# EAGLE board breakout (EAGLE 9.4.2)
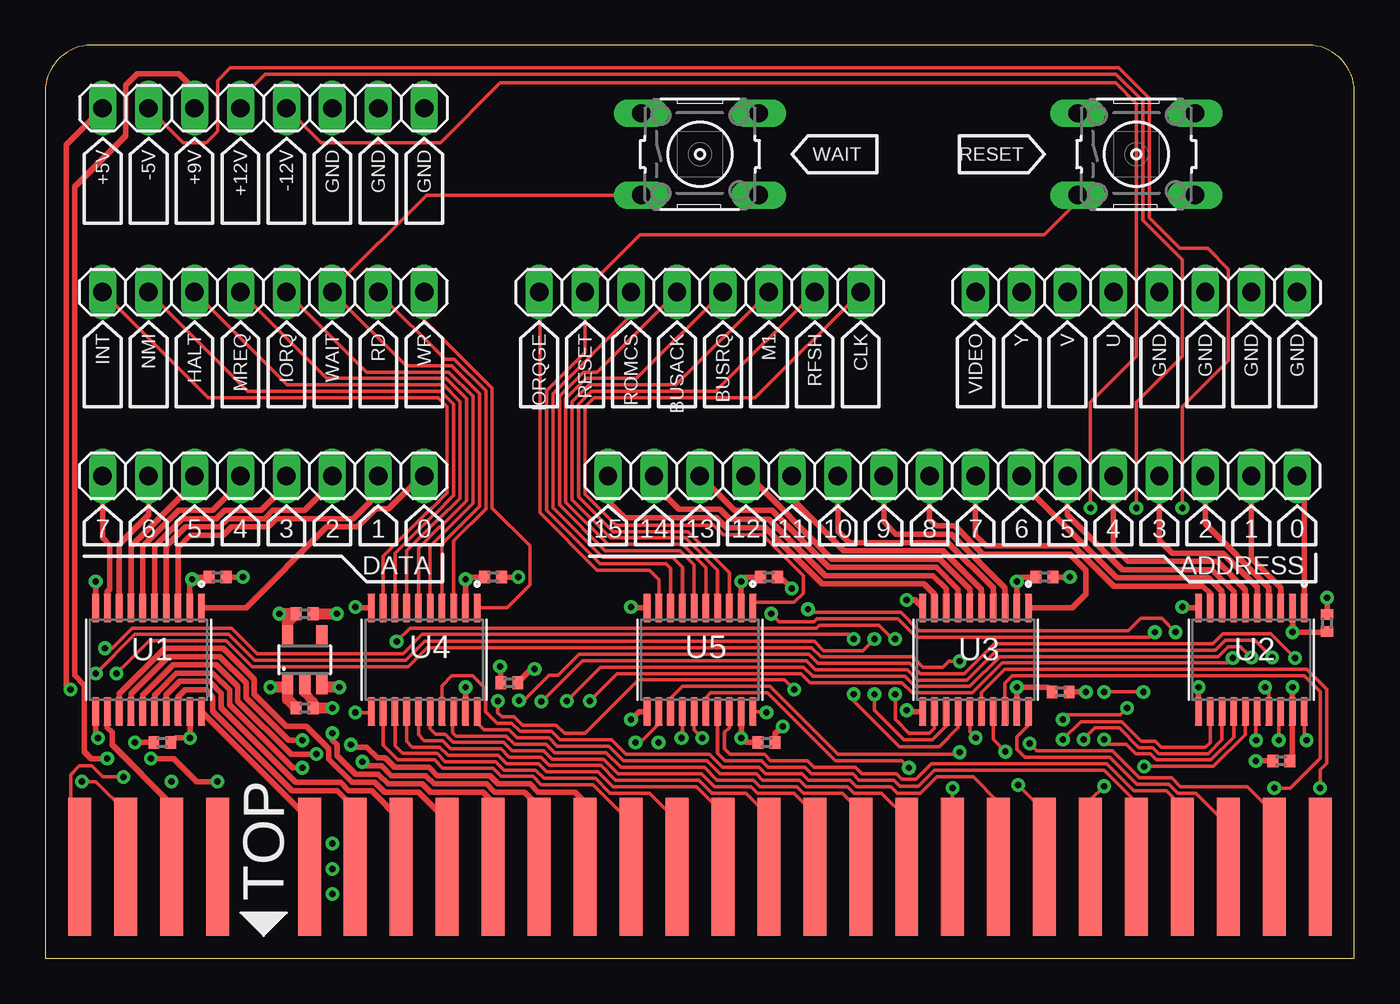
[diagram p0: board, top side]
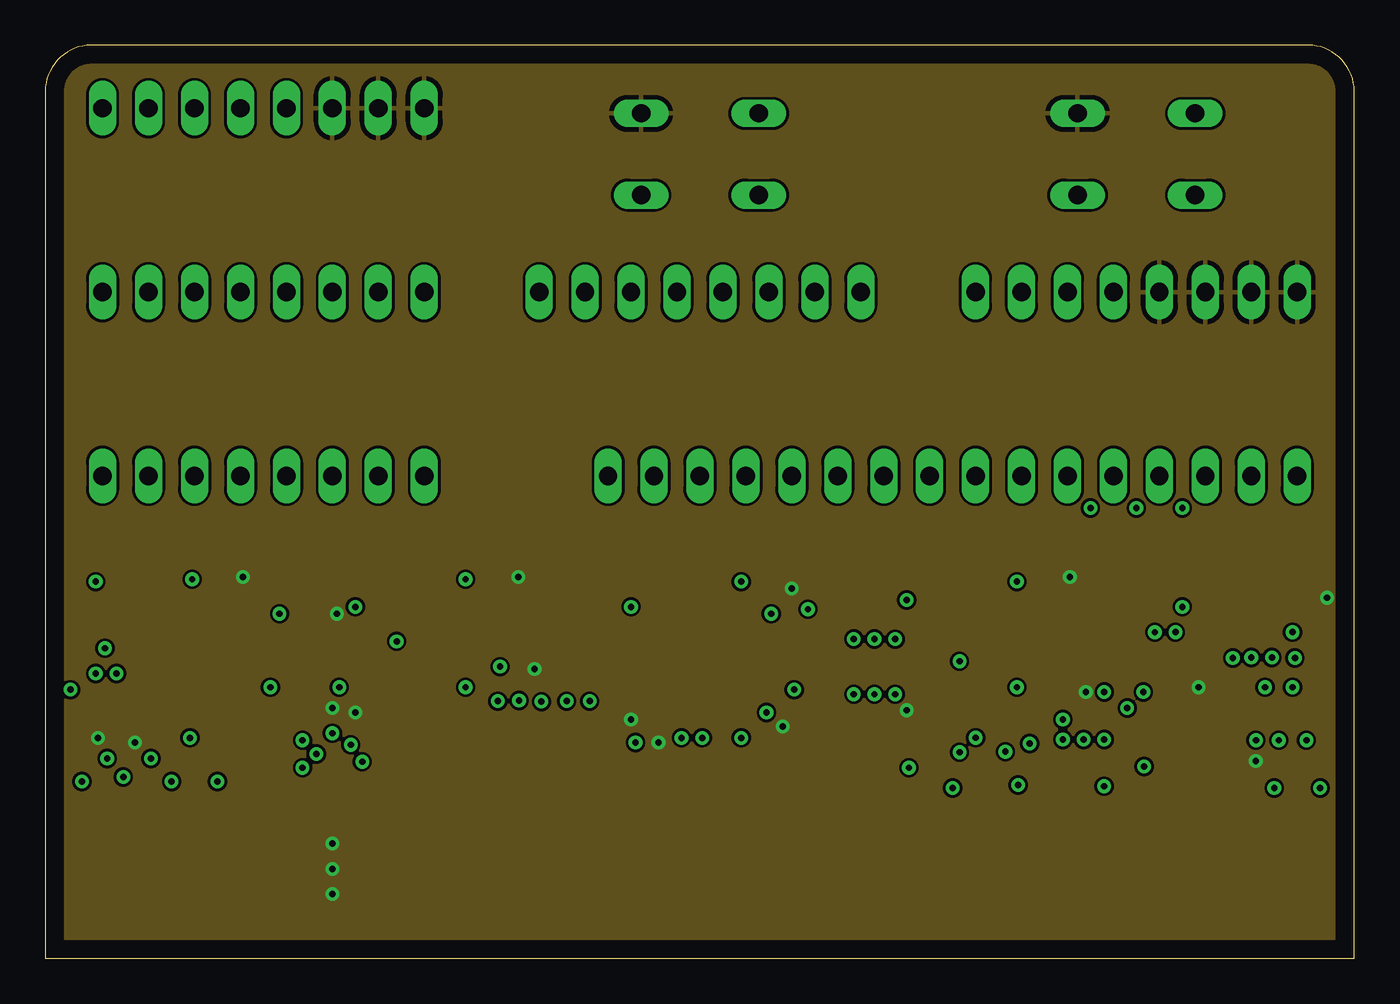
[diagram p1: board, inner layer Route2]
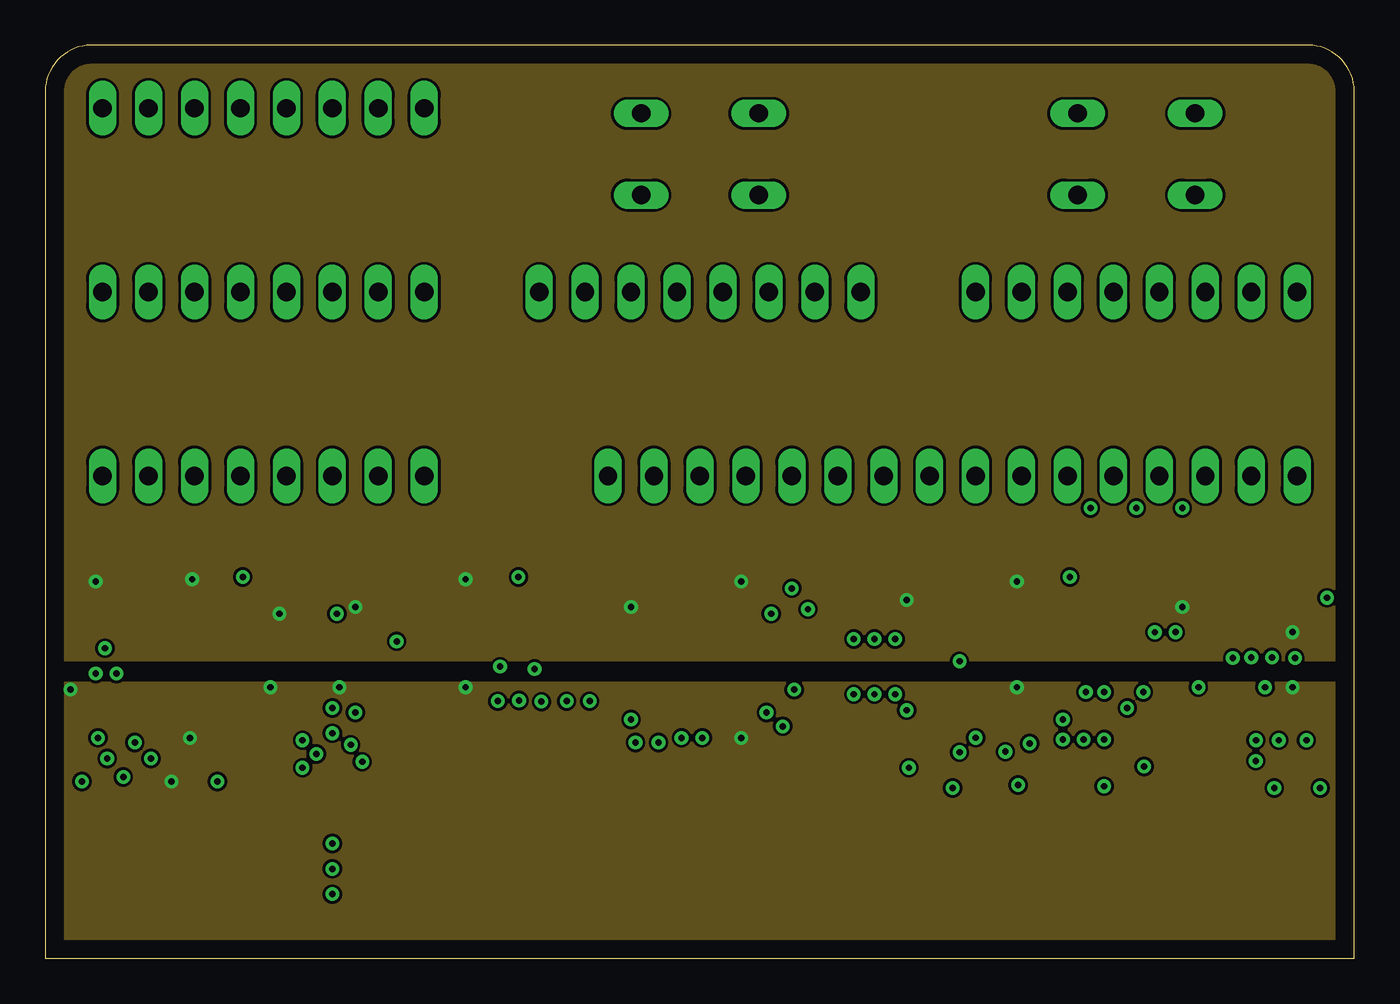
[diagram p2: board, inner layer Route15]
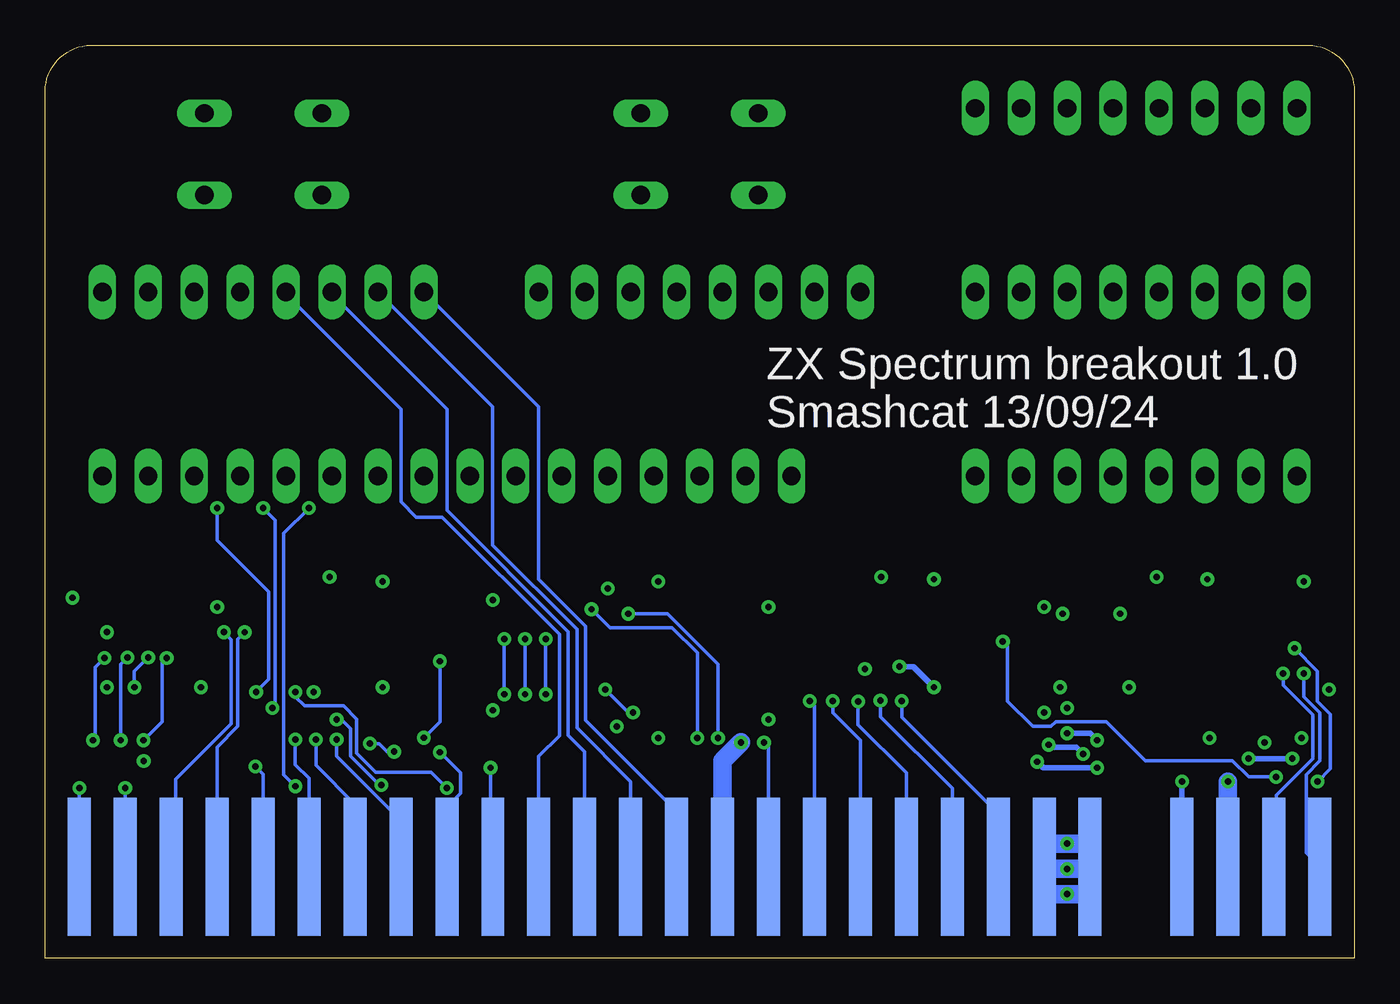
[diagram p3: board, bottom side, seen from below]

Size 72.37 x 50.47 mm. Coordinates in mm from the lower left corner, seen from the top.
Outline: 0,0 72.37,0 72.37,47.93 arc90 69.83,50.47 2.54,50.47 arc90 0,47.93 0,0
Copper layers (1+2*15+16): Top 0.035mm / dielectric 0.1mm / Route2 0.0175mm / dielectric 1.265mm / Route15 0.0175mm / dielectric 0.1mm / Bottom 0.035mm
Design rules "default *": minimum track width 6mil, minimum drill 0.35mm, track to track 6mil, track to pad 6mil, pad to pad 6mil, via to via 6mil, smd to smd 6mil, copper to edge 40mil, drill to drill 6mil, minimum pad ring 10mil, minimum via ring 8mil, stop-mask expansion 4mil, vias tented up to drill 0mil, thermal gap 10mil

## Footprints (pad centres in the part's own frame; a part is rotated, then mirrored left to right if it is on the bottom)
NCP718BSN330T1G = smd 0.62 x 1.22: 1 -0.95,-1.3; 2 0,-1.3; 3 0.95,-1.3; 4 0.95,1.3; 5 -0.95,1.3
C0402 = smd 0.6 x 0.7: 1 -0.47,0; 2 0.47,0
1X08 = drill 1.016 long: 1 -8.89,0; 2 -6.35,0; 3 -3.81,0; 4 -1.27,0; 5 1.27,0; 6 3.81,0; 7 6.35,0; 8 8.89,0
1X16 = drill 1.016 long: 1 -19.05,0; 2 -16.51,0; 3 -13.97,0; 4 -11.43,0; 5 -8.89,0; 6 -6.35,0; 7 -3.81,0; 8 -1.27,0; 9 1.27,0; 10 3.81,0; 11 6.35,0; 12 8.89,0; 13 11.43,0; 14 13.97,0; 15 16.51,0; 16 19.05,0
B3F-10XX-3D = drill 1.016 long: 1 -3.251,2.261; 2 3.251,2.261; 3 -3.251,-2.261; 4 3.251,-2.261
SOP65P640X120-20N = smd 1.57 x 0.41: 1 -2.87,2.925; 2 -2.87,2.275; 3 -2.87,1.625; 4 -2.87,0.975; 5 -2.87,0.325; 6 -2.87,-0.325; 7 -2.87,-0.975; 8 -2.87,-1.625; 9 -2.87,-2.275; 10 -2.87,-2.925; 11 2.87,-2.925; 12 2.87,-2.275; 13 2.87,-1.625; 14 2.87,-0.975; 15 2.87,-0.325; 16 2.87,0.325; 17 2.87,0.975; 18 2.87,1.625; 19 2.87,2.275; 20 2.87,2.925
ZX-SPECTRUM-EDGE-CONNECTOR = smd 1.27 x 7.62: A1 0,0; A2 2.54,0; A3 5.08,0; A4 7.62,0; A6 12.7,0; A7 15.24,0; A8 17.78,0; A9 20.32,0; A10 22.86,0; A11 25.4,0; A12 27.94,0; A13 30.48,0; A14 33.02,0; A15 35.56,0; A16 38.1,0; A17 40.64,0; A18 43.18,0; A19 45.72,0; A20 48.26,0; A21 50.8,0; A22 53.34,0; A23 55.88,0; A24 58.42,0; A25 60.96,0; A26 63.5,0; A27 66.04,0; A28 68.58,0 | smd 1.27 x 7.62 bottom: B1 0,0; B2 2.54,0; B3 5.08,0; B4 7.62,0; B6 12.7,0; B7 15.24,0; B8 17.78,0; B9 20.32,0; B10 22.86,0; B11 25.4,0; B12 27.94,0; B13 30.48,0; B14 33.02,0; B15 35.56,0; B16 38.1,0; B17 40.64,0; B18 43.18,0; B19 45.72,0; B20 48.26,0; B21 50.8,0; B22 53.34,0; B23 55.88,0; B24 58.42,0; B25 60.96,0; B26 63.5,0; B27 66.04,0; B28 68.58,0

## Placement (x,y rotation side)
3V3_REG4  3V3  [NCP718BSN330T1G]  14.35,16.51 0 top
C1  100nF  [C0402]  9.53,21.08 0 top
C2  100nF  [C0402]  6.48,11.94 180 top
C3  100nF  [C0402]  24.77,21.08 0 top
C4  100nF  [C0402]  25.65,15.24 0 top
C5  100nF  [C0402]  40.01,21.08 0 top
C6  100nF  [C0402]  39.88,11.94 0 top
C7  100nF  [C0402]  55.24,21.08 0 top
C8  100nF  [C0402]  56.13,14.73 0 top
C9  100nF  [C0402]  70.87,18.54 90 top
C10  100nF  [C0402]  68.33,10.92 180 top
C34  1uF  [C0402]  14.35,13.84 0 top
C35  1uF  [C0402]  14.35,19.05 0 top
JP1  [1X08]  12.06,26.67 180 top
JP2  [1X16]  50.16,26.67 180 top
JP3  [1X08]  12.06,46.99 0 top
JP4  [1X08]  36.2,36.83 180 top
JP5  [1X08]  60.33,36.83 0 top
JP7  [1X08]  12.06,36.83 180 top
RESET_BUTTON  [B3F-10XX-3D]  60.33,44.45 0 top
U1  TXB0108PWR  [SOP65P640X120-20N]  5.71,16.51 270 top
U2  TXB0108PWR  [SOP65P640X120-20N]  66.67,16.51 270 top
U3  TXB0108PWR  [SOP65P640X120-20N]  51.44,16.51 270 top
U4  TXB0108PWR  [SOP65P640X120-20N]  20.95,16.51 270 top
U5  TXB0108PWR  [SOP65P640X120-20N]  36.2,16.51 270 top
U$1  ZX-SPECTRUM-EDGE-CONNECTOR  [ZX-SPECTRUM-EDGE-CONNECTOR]  1.91,5.08 0 top
WAIT_BUTTON  [B3F-10XX-3D]  36.2,44.45 0 top

## Library data of the parts
3V3_REG4 = IC-packages_BIG-pack V1.0
C1-C10 C34 C35 = resistors-scott; SPICEPREFIX: C
JP1-JP5 JP7 = pinhead
RESET_BUTTON WAIT_BUTTON = switch-omron
U1-U5 = TXB0108PWR; AVAILABILITY: In Stock; CHECK_PRICES: https://www.snapeda.com/parts/TXB0108PWR/Texas+Instruments/view-part/?ref=eda; DESCRIPTION: 8-Bit Bidirectional Voltage-Level Shifter with Auto Direction Sensing and +/-15-kV ESD Protect; MF: Texas Instruments; MP: TXB0108PWR; PACKAGE: TSSOP-20 Texas Instruments; PRICE: None; PURCHASE-URL: https://www.snapeda.com/api/url_track_click_mouser/?unipart_id=45111&manufacturer=Texas Instruments&part_name=TXB0108PWR&search_term=None; SNAPEDA_LINK: https://www.snapeda.com/parts/TXB0108PWR/Texas+Instruments/view-part/?ref=snap
U$1 = zx

## Nets
3V3: 3V3_REG4.5 C1.1 C3.1 C5.1 C7.1 C9.1 C35.1 U1.2 U1.10 U2.2 U2.10 U3.2 U3.10 U4.2 U4.10 U5.2 U5.10
+5V: 3V3_REG4.1 3V3_REG4.3 C2.1 C4.1 C6.1 C8.1 C10.1 C34.1 JP3.1 U1.19 U2.19 U3.19 U4.19 U5.19 U$1.B3
+9V: JP3.3 U$1.B4
+12V: JP3.4 U$1.A22
-5V: JP3.2 U$1.A20
-12V: JP3.5 U$1.A23
/BUSACK: U5.15 U$1.B26
/BUSACK_LOW: JP4.5 U5.6
/BUSRQ: U5.16 U$1.B19
/BUSRQ_LOW: JP4.4 U5.5
/HALT: U4.14 U$1.A15
/HALT_LOW: JP7.6 U4.7
/INT: U4.12 U$1.A13
/INT_LOW: JP7.8 U4.9
/IORQ: U4.16 U$1.A17
/IORQ_LOW: JP7.4 U4.5
/IORQGE: U5.12 U$1.B13
/IORQGE_LOW: JP4.8 U5.9
/M1: U5.17 U$1.A24
/M1_LOW: JP4.3 U5.4
/MREQ: U4.15 U$1.A16
/MREQ_LOW: JP7.5 U4.6
/NMI: U4.13 U$1.A14
/NMI_LOW: JP7.7 U4.8
/RD: U4.18 U$1.A18
/RD_LOW: JP7.2 U4.3
/RESET: U5.13 U$1.B20
/RESET_LOW: JP4.7 RESET_BUTTON.3 U5.8
/RFSH: U5.18 U$1.A25
/RFSH_LOW: JP4.2 U5.3
/ROMCS: U5.14 U$1.B25
/ROMCS_LOW: JP4.6 U5.7
/WAIT: U4.17 U$1.A21
/WAIT_LOW: JP7.3 U4.4 WAIT_BUTTON.3
/WR: U4.20 U$1.A19
/WR_LOW: JP7.1 U4.1
A0: U2.20 U$1.B9
A0_LOW: JP2.1 U2.1
A1: U2.18 U$1.B10
A1_LOW: JP2.2 U2.3
A2: U2.17 U$1.B11
A2_LOW: JP2.3 U2.4
A3: U2.16 U$1.B12
A3_LOW: JP2.4 U2.5
A4: U2.15 U$1.B24
A4_LOW: JP2.5 U2.6
A5: U2.14 U$1.B23
A5_LOW: JP2.6 U2.7
A6: U2.13 U$1.B22
A6_LOW: JP2.7 U2.8
A7: U2.12 U$1.B21
A7_LOW: JP2.8 U2.9
A8: U3.20 U$1.A26
A8_LOW: JP2.9 U3.1
A9: U3.18 U$1.B27
A9_LOW: JP2.10 U3.3
A10: U3.17 U$1.A27
A10_LOW: JP2.11 U3.4
A11: U3.16 U$1.B28
A11_LOW: JP2.12 U3.5
A12: U3.15 U$1.B2
A12_LOW: JP2.13 U3.6
A13: U3.14 U$1.A2
A13_LOW: JP2.14 U3.7
A14: U3.13 U$1.B1
A14_LOW: JP2.15 U3.8
A15: U3.12 U$1.A1
A15_LOW: JP2.16 U3.9
CLK: U5.20 U$1.B8
CLK_LOW: JP4.1 U5.1
D0: U1.20 U$1.A6
D0_LOW: JP1.1 U1.1
D1: U1.18 U$1.A7
D1_LOW: JP1.2 U1.3
D2: U1.17 U$1.A8
D2_LOW: JP1.3 U1.4
D3: U1.16 U$1.A11
D3_LOW: JP1.4 U1.5
D4: U1.15 U$1.A12
D4_LOW: JP1.5 U1.6
D5: U1.14 U$1.A10
D5_LOW: JP1.6 U1.7
D6: U1.13 U$1.A9
D6_LOW: JP1.7 U1.8
D7: U1.12 U$1.A3
D7_LOW: JP1.8 U1.9
GND: 3V3_REG4.2 C1.2 C2.2 C3.2 C4.2 C5.2 C6.2 C7.2 C8.2 C9.2 C10.2 C34.2 C35.2 JP3.6 JP3.7 JP3.8 JP5.5 JP5.6 JP5.7 JP5.8 RESET_BUTTON.1 U1.11 U2.11 U3.11 U4.11 U5.11 U$1.B6 U$1.B7 U$1.B14 WAIT_BUTTON.1
U: JP5.4 U$1.B18
V: JP5.3 U$1.B17
VIDEO: JP5.1 U$1.B15
Y: JP5.2 U$1.B16

## Tracks (layer width: path | path; a pad name or v marks a point on that pad's centre or on a via)
3V3  (via drill 0.35)
  Top 0.305: U1.2 7.99,20.78 8.13,20.91 v8.13,20.95 8.26,21.08 C1.1 | U4.10 17.2,19.38 v17.14,19.43 | U5.10 32.44,19.38 v32.38,19.43 | U4.2 v23.23,20.94 v23.24,20.95 23.37,21.08 C3.1 | U3.10 48.08,19.81 v47.62,19.81 | U3.2 53.71,20.52 53.72,20.53 v53.72,20.83 53.98,21.08 C7.1 | U5.2 38.47,20.82 v38.48,20.83 38.73,21.08 C5.1 | U2.10 62.92,19.38 v62.87,19.43 | U2.2 v68.96,18.03 70.83,18.03 C9.1 | v2.79,20.83 U1.10
  Top 0.61: 3V3_REG4.5 13.4,18.57 C35.1 v12.95,19.05
  pour Route15: -3.81,16.51 76.2,16.51 76.2,57.15 -3.81,57.15
+5V  (via drill 0.35)
  Top 0.305: U1.19 8,13.63 v8,12.19 7.2,12.19 C2.1 | JP3.1 1.17,44.98 1.17,15.09 v1.39,14.86 | U4.19 23.23,14.97 v23.24,14.99 | U5.19 38.47,12.84 38.48,12.83 v38.48,12.19 38.73,11.94 C6.1 | U3.19 53.71,14.97 v53.72,14.99 55.41,14.99 C8.1 | v68.96,14.99 68.95,14.97 U2.19 68.95,11.08 C10.1 | C4.1 25.18,16.09 v25.15,16.13
  Top 0.61: C34.1 13.4,14.32 3V3_REG4.1 13.18,14.99 v12.45,14.99 | v16.26,14.99 15.53,14.99 3V3_REG4.3
  Bottom 0.305: v25.15,16.13 24.38,16.13 v23.24,14.99
  Bottom 1.016: U$1.B3 v6.99,9.78
  pour Route15: -3.81,15.24 76.2,15.24 76.2,-3.81 -3.81,-3.81
+9V  (via drill 0.35)
  Top 0.305: JP3.3 8.26,48.01 7.37,48.9 5.08,48.9 4.45,48.26 4.45,45.47 1.63,42.65 1.63,15.65 2.16,15.11 2.16,11.43 2.54,11.05 v3.43,11.05 | v5.84,11.05 7.11,11.05 8.38,9.78 v9.53,9.78
  Bottom 0.305: v3.43,11.05 v5.84,11.05 | U$1.B4 v9.53,9.78
+12V  (via drill 0.35)
  Top 0.203: U$1.A22 55.24,8.13 v53.78,9.59 | v59.82,13.84 59.44,13.46 56.52,13.46 v56.26,13.21 | JP3.4 10.79,47.5 12.17,48.87 59.2,48.87 60.68,47.39 60.68,40.79 62.87,38.61 62.87,33.27 60.33,30.73 v60.33,24.89
  Bottom 0.203: v53.78,9.59 53.91,9.59 55.5,11.18 55.5,12.7 56.01,13.21 v56.26,13.21 | v59.82,13.84 59.66,14 59.66,24.23 v60.33,24.89
-5V  (via drill 0.35)
  Top 0.203: U$1.A20 v50.16,9.42 | v58.55,14.73 v60.71,14.73 | JP3.2 7.62,45.09 8.89,45.09 9.53,45.72 9.53,48.51 10.24,49.23 59.35,49.23 61.04,47.54 61.04,40.94 62.73,39.24 64.26,39.24 65.41,38.1 65.41,33.02 62.87,30.48 v62.87,24.89
  Bottom 0.203: v50.16,9.42 51.03,10.29 54.1,10.29 55.14,11.33 55.14,13.23 55.88,13.97 58.04,13.97 58.55,14.48 v58.55,14.73 | v60.71,14.73 60.02,15.42 60.02,20.27 62.87,23.11 v62.87,24.89
-12V  (via drill 0.35)
  Top 0.203: U$1.A23 57.78,8.76 v58.54,9.52 | v57.78,24.89 57.78,30.73 60.33,33.27 60.33,47.24 59.18,48.39 25.15,48.39 21.84,45.09 15.24,45.09 JP3.5
  Bottom 0.203: v58.54,9.52 59.18,10.16 59.18,23.5 v57.78,24.89
/BUSACK  (via drill 0.35)
  Top 0.203: v62.48,18.03 61.72,18.8 60.58,18.8 59.89,18.11 48.31,18.11 47.3,19.12 42.34,19.12 v42.16,19.3 | v36.32,12.19 35.87,12.64 U5.15
  Bottom 0.203: U$1.B26 65.15,5.33 65.15,9.9 62.08,12.97 62.08,17.63 v62.48,18.03 | v42.16,19.3 41.15,18.29 37.71,18.29 36.32,16.9 v36.32,12.19
/BUSACK_LOW
  Top 0.203: U5.6 35.87,21.75 35.09,22.53 30.96,22.53 28.42,25.07 28.42,31.07 29.76,32.41 30.5,32.41 JP4.5
/BUSRQ  (via drill 0.35)
  Top 0.203: v47.75,10.54 47.37,10.92 43.69,10.92 39.93,14.68 36.78,14.68 36.52,14.42 U5.16
  Bottom 0.203: v47.75,10.54 47.75,5.21 U$1.B19
/BUSRQ_LOW
  Top 0.203: U5.5 36.52,21.61 35.24,22.89 31.11,22.89 28.78,25.21 28.78,30.92 29.91,32.05 32.69,32.05 JP4.4
/HALT
  Top 0.203: U4.14 19.98,12 20.3,11.68 21.81,11.68 22.27,11.23 25.05,11.23 25.5,10.77 27.26,10.77 27.72,10.31 30.57,10.31 31.38,9.5 35.99,9.5 37.47,8.03 U$1.A15
/HALT_LOW
  Top 0.203: U4.7 19.98,22.53 21.63,24.18 21.67,24.18 22.94,25.45 22.94,30.77 22.01,31.7 13.39,31.7 JP7.6
/INT
  Top 0.203: U$1.A13 32.38,7.49 30.28,9.6 27.42,9.6 26.96,10.06 25.21,10.06 24.75,10.52 21.97,10.52 21.51,10.97 19.49,10.97 18.68,11.79 U4.12
/INT_LOW
  Top 0.203: U4.9 18.68,22.24 21.34,24.89 21.38,24.89 22.23,25.74 22.23,30.48 21.72,30.99 9.02,30.99 JP7.8
/IORQ
  Top 0.203: U$1.A17 42.55,8 41.4,9.14 39.37,9.14 39.01,9.5 37,9.5 36.29,10.21 31.68,10.21 30.87,11.02 28.01,11.02 27.55,11.48 25.8,11.48 25.34,11.94 22.56,11.94 22.1,12.39 21.59,12.39 21.28,12.71 U4.16
/IORQ_LOW
  Top 0.203: U4.5 21.28,22.79 23.65,25.15 23.65,31.07 22.31,32.41 17.75,32.41 JP7.4
/IORQGE  (via drill 0.35)
  Top 0.203: v32.64,11.94 32.9,11.94 33.92,12.96 U5.12
  Bottom 0.203: U$1.B13 32.38,11.69 v32.64,11.94
/IORQGE_LOW
  Top 0.203: U5.9 33.92,20.94 33.4,21.46 30.52,21.46 27.36,24.62 27.36,36.78 JP4.8
/M1
  Top 0.203: U$1.A24 60.33,8.64 58.55,10.41 49.15,10.41 48.27,9.53 47.24,9.53 46.91,9.86 45,9.86 44.64,10.21 42.35,10.21 42,10.57 39.96,10.57 39.6,10.92 37.59,10.92 37.17,11.34 U5.17
/M1_LOW
  Top 0.203: U5.4 37.17,21.46 35.39,23.24 31.25,23.24 29.13,25.36 29.13,30.77 30.06,31.7 34.87,31.7 JP4.3
/MREQ
  Top 0.203: U$1.A16 40.01,7.87 38.73,9.14 36.85,9.14 36.14,9.86 31.53,9.86 30.72,10.67 27.86,10.67 27.41,11.12 25.65,11.12 25.2,11.58 22.41,11.58 21.96,12.04 20.95,12.04 20.63,12.36 U4.15
/MREQ_LOW
  Top 0.203: U4.6 20.63,22.68 21.78,23.82 21.82,23.82 23.29,25.3 23.29,30.92 22.16,32.05 15.57,32.05 JP7.5
/NMI
  Top 0.203: U$1.A14 34.92,7.62 33.4,9.14 31.24,9.14 30.42,9.96 27.57,9.96 27.11,10.41 25.36,10.41 24.9,10.87 22.12,10.87 21.66,11.33 19.77,11.33 19.33,11.77 U4.13
/NMI_LOW
  Top 0.203: U4.8 19.33,22.38 21.48,24.54 21.52,24.54 22.58,25.59 22.58,30.63 21.86,31.34 11.2,31.34 JP7.7
/RD
  Top 0.203: U$1.A18 45.09,8.13 44.07,9.14 41.91,9.14 41.55,9.5 39.52,9.5 39.16,9.86 37.15,9.86 36.43,10.57 31.83,10.57 31.01,11.38 28.16,11.38 27.7,11.84 25.95,11.84 25.49,12.29 22.71,12.29 22.52,12.48 22.52,13.58 U4.18
/RD_LOW
  Top 0.203: U4.3 22.58,23.08 24.36,24.86 24.36,31.36 22.6,33.12 22.1,33.12 18.41,36.8 JP7.2
/RESET  (via drill 0.35)
  Top 0.203: U5.13 34.57,14.38 35.23,15.04 40.08,15.04 43.84,11.28 50.43,11.28 v50.55,11.4
  Bottom 0.203: U$1.B20 50.16,8.38 49.4,9.14 49.4,10.25 v50.55,11.4
/RESET_LOW
  Top 0.203: U5.8 34.57,21.56 34.31,21.82 30.66,21.82 27.71,24.77 27.71,31.36 29.84,33.5 JP4.7 29.84,36.96 32.89,40.01 55.24,40.01 57.07,41.83 RESET_BUTTON.3
/RFSH
  Top 0.203: U$1.A25 62.87,8.38 61.98,9.27 60.19,9.27 58.7,10.76 49,10.76 48.14,9.91 47.36,9.91 47.06,10.21 45.15,10.21 44.79,10.57 42.5,10.57 42.14,10.92 40.11,10.92 39.75,11.28 37.87,11.28 37.57,11.58 37.57,12.5 37.82,12.75 U5.18
/RFSH_LOW
  Top 0.203: U5.3 37.82,21.31 35.53,23.6 31.4,23.6 29.49,25.51 29.49,30.63 30.21,31.34 37.06,31.34 JP4.2
/ROMCS  (via drill 0.35)
  Top 0.203: v61.34,18.03 61.06,17.75 48.16,17.75 47.15,18.77 42.65,18.77 42.5,18.62 40.56,18.62 v40.13,19.05 | v35.18,12.19 35.22,12.23 U5.14
  Bottom 0.203: U$1.B25 62.87,11.68 61.72,12.83 61.72,17.65 v61.34,18.03 | v40.13,19.05 37.97,19.05 35.18,16.26 v35.18,12.19
/ROMCS_LOW
  Top 0.203: U5.7 35.22,21.62 34.67,22.17 30.81,22.17 28.07,24.92 28.07,31.22 32.38,35.53 JP4.6
/WAIT
  Top 0.203: U$1.A21 52.7,8.64 51.31,10.03 50.45,10.03 50.43,10.05 49.3,10.05 48.39,9.14 47.12,9.14 46.76,9.5 44.85,9.5 44.5,9.86 42.2,9.86 41.85,10.21 39.81,10.21 39.46,10.57 37.44,10.57 36.73,11.28 32.12,11.28 31.31,12.09 28.45,12.09 28,12.55 26.24,12.55 25.78,13.01 24.97,13.01 24.34,13.63 24.34,14.9 23.62,15.62 22.48,15.62 21.93,15.07 U4.17
/WAIT_LOW
  Top 0.203: U4.4 21.93,22.93 24,25 24,31.22 22.45,32.77 19.94,32.77 JP7.3 15.88,36.98 21.08,42.19 WAIT_BUTTON.3
/WR
  Top 0.203: U$1.A19 47.62,7.75 46.23,9.14 44.7,9.14 44.35,9.5 42.06,9.5 41.7,9.86 39.66,9.86 39.31,10.21 37.29,10.21 36.58,10.92 31.97,10.92 31.16,11.73 28.31,11.73 27.85,12.19 26.09,12.19 25.64,12.65 24.26,12.65 23.88,13.03 U4.20
/WR_LOW
  Top 0.203: JP7.1 20.95,35.27 24.71,31.51 24.71,24.89 26.8,22.81 26.8,20.65 25.53,19.38 U4.1
A0  (via drill 0.35)
  Top 0.203: v26.19,14.25 26.45,14.25 27.84,15.65 28.35,15.65 29.52,16.82 42.23,16.82 42.73,16.31 47.81,16.31 48.37,15.75 50.82,15.75 52.47,17.4 64.55,17.4 65.1,17.95 67.75,17.95 v69.09,16.61 | v69.72,12.06 69.6,12.19 U2.20
  Bottom 0.203: U$1.B9 22.23,9.4 26.19,13.37 v26.19,14.25 | v69.72,12.06 69.59,12.2 69.59,16.1 v69.09,16.61
A0_LOW
  Top 0.305: U2.1 69.6,26.29 JP2.1
A1  (via drill 0.35)
  Top 0.203: v27.43,14.2 29.7,16.46 42.08,16.46 42.59,15.95 47.67,15.95 48.23,15.39 50.97,15.39 52.62,17.04 64.7,17.04 65.25,17.6 66.86,17.6 v67.82,16.64 | U2.18 68.2,13.54 v68.2,12.06
  Bottom 0.203: U$1.B10 24.77,10.26 27.43,12.93 v27.43,14.2 | v67.82,16.64 68.2,16.26 v68.2,12.06
A1_LOW
  Top 0.305: U2.3 68.3,20.5 66.67,22.12 JP2.2
A2  (via drill 0.35)
  Top 0.203: v28.83,14.22 30.71,16.1 41.93,16.1 42.44,15.6 47.52,15.6 48.08,15.04 51.11,15.04 52.77,16.69 64.84,16.69 65.4,17.24 66.07,17.24 v66.67,16.64 | v67.44,14.99 67.65,14.77 U2.17
  Bottom 0.203: U$1.B11 27.3,12.06 28.83,13.59 v28.83,14.22 | v66.67,16.64 67.44,15.88 v67.44,14.99
A2_LOW
  Top 0.305: U2.4 67.65,20.5 64.14,24.02 JP2.3
A3  (via drill 0.35)
  Top 0.203: v30.1,14.22 v30.1,14.23 31.62,15.75 41.78,15.75 42.29,15.24 47.37,15.24 47.93,14.68 51.26,14.68 52.91,16.33 65.38,16.33 v65.66,16.61 | v66.93,12.06 66.93,13.57 U2.16
  Bottom 0.203: U$1.B12 29.84,13.97 v30.1,14.22 | v65.66,16.61 65.91,16.36 65.91,13.08 v66.93,12.06
A3_LOW
  Top 0.305: U2.5 67,20.5 65.1,22.4 62.31,22.4 61.59,23.11 JP2.4
A4  (via drill 0.35)
  Top 0.203: U2.15 66.35,12.38 64.59,10.61 v60.75,10.61
  Bottom 0.203: v60.75,10.61 60.33,10.19 U$1.B24
A4_LOW
  Top 0.305: U2.6 66.35,20.39 64.8,21.95 59.84,21.95 59.05,22.73 JP2.5
A5  (via drill 0.35)
  Top 0.203: v58.55,12.11 58.82,11.83 59.78,11.83 60.3,11.3 61.09,11.3 61.42,10.97 64.44,10.97 65.7,12.23 U2.14
  Bottom 0.203: U$1.B23 57.78,9.95 58.55,10.71 v58.55,12.11
A5_LOW
  Top 0.305: U2.7 65.7,20.29 64.5,21.49 59.54,21.49 56.52,24.51 JP2.6
A6  (via drill 0.35)
  Top 0.203: v57.4,12.11 58.04,12.74 59.37,12.74 60.45,11.66 61.23,11.66 61.57,11.33 64.3,11.33 65.05,12.08 U2.13
  Bottom 0.203: U$1.B22 55.24,8.51 57.4,10.67 v57.4,12.11
A6_LOW
  Top 0.305: U2.8 65.05,20.29 64.31,21.03 59.26,21.03 53.98,26.31 JP2.7
A7  (via drill 0.35)
  Top 0.203: v56.26,12.11 57.25,13.1 59.52,13.1 60.6,12.01 61.38,12.01 61.72,11.68 64.15,11.68 64.4,11.93 U2.12
  Bottom 0.203: v56.26,12.11 56.26,11.18 52.7,7.62 U$1.B21
A7_LOW
  Top 0.305: U2.9 64.4,20.18 64.01,20.57 59.07,20.57 56.83,22.81 52.03,22.81 51.44,23.4 JP2.8
A8
  Top 0.203: U$1.A26 65.41,7.34 63.6,9.14 62.61,9.14 62.12,9.63 60.34,9.63 58.85,11.12 54.16,11.12 53.73,11.55 53.73,12.24 54.36,12.88 U3.20
A8_LOW
  Top 0.305: U3.1 56.77,19.38 57.53,20.14 57.53,21.46 56.64,22.35 51.84,22.35 50.29,23.9 49.28,23.9 48.9,24.28 JP2.9
A9  (via drill 0.35)
  Top 0.203: v67.94,9.42 68.83,9.42 70.48,11.07 70.48,14.73 69.6,15.62 53.46,15.62 53.06,15.22 U3.18
  Bottom 0.203: U$1.B27 v67.94,9.42
A9_LOW
  Top 0.305: U3.3 53.06,20.48 50.1,23.44 47.04,23.44 46.35,24.13 JP2.10
A10  (via drill 0.35)
  Top 0.203: U$1.A27 67.94,8 66.45,9.5 62.75,9.5 62.27,9.98 60.49,9.98 58.99,11.47 54.82,11.47 v54.42,11.88 | v53.09,11.43 52.41,12.11 U3.17
  Bottom 0.203: v54.42,11.88 53.92,11.88 53.47,11.43 v53.09,11.43
A10_LOW
  Top 0.305: U3.4 52.41,20.49 49.91,22.99 44.45,22.99 43.81,23.62 JP2.11
A11  (via drill 0.35)
  Top 0.203: v70.48,9.42 70.48,10.44 70.84,10.8 70.84,14.88 69.74,15.98 53.06,15.98 51.76,14.68 U3.16
  Bottom 0.203: U$1.B28 v70.48,9.42
A11_LOW
  Top 0.305: U3.5 51.76,20.41 49.64,22.53 44.15,22.53 41.27,25.4 JP2.12
A12  (via drill 0.35)
  Top 0.203: v3.94,15.75 5.74,17.55 10.01,17.55 11.43,16.13 20.07,16.13 21.11,17.17 42.37,17.17 42.88,16.66 47.96,16.66 48.52,16.1 49.63,16.1 49.96,16.43 v50.55,16.43 | v51.43,12.2 51.11,12.52 U3.15
  Bottom 0.203: U$1.B2 4.32,5.21 4.32,9.02 2.29,11.05 2.29,13.46 3.94,15.11 v3.94,15.75 | v50.55,16.43 50.55,13.08 v51.43,12.2
A12_LOW
  Top 0.305: U3.6 51.11,20.41 49.45,22.07 43.51,22.07 38.91,26.67 JP2.13
A13  (via drill 0.35)
  Top 0.203: v3.3,17.15 3.69,17.15 4.81,18.26 10.3,18.26 11.72,16.84 19.78,16.84 20.84,17.91 44.45,17.91 v44.7,17.65 | v2.03,9.78 2.8,9.78 4.45,8.13 U$1.A2 | v44.7,14.61 44.7,14.22 47.22,11.71 49.43,11.71 50.46,12.74 U3.14
  Bottom 0.203: v3.3,17.15 2.03,15.88 2.03,14.22 1.32,13.51 1.32,10.48 v2.03,9.78 | v44.7,17.65 v44.7,14.61
A13_LOW
  Top 0.305: U3.7 50.46,20.42 49.26,21.61 43.32,21.61 40.17,24.77 38.1,24.77 JP2.14
A14  (via drill 0.35)
  Top 0.203: v2.79,15.75 4.95,17.91 10.15,17.91 11.57,16.48 19.92,16.48 20.96,17.53 42.52,17.53 43.03,17.02 45.21,17.02 v45.85,17.65 | U3.13 49.81,12.86 49.04,12.09 47.47,12.09 45.85,13.72 v45.85,14.61
  Bottom 0.203: v2.79,15.75 2.79,14.48 1.91,13.59 1.91,10.92 2.67,10.16 2.67,5.84 U$1.B1 | v45.85,14.61 v45.85,17.65
A14_LOW
  Top 0.305: U3.8 49.81,20.42 49.07,21.16 43.13,21.16 40.02,24.27 37.86,24.27 37.31,24.82 35.05,24.82 33.66,26.21 JP2.15
A15  (via drill 0.35)
  Top 0.203: U$1.A1 1.91,7.62 1.4,8.13 1.4,10.16 1.88,10.64 2.56,10.64 3.17,10.03 v4.32,10.03 | v46.99,17.65 46.86,17.65 46.1,18.41 42.8,18.41 42.65,18.26 20.17,18.26 v19.43,17.53 | v46.99,14.61 46.99,13.21 47.75,12.45 48.9,12.45 49.16,12.71 U3.12
  Bottom 0.203: v4.32,10.03 5.84,10.03 6.73,10.92 11.56,10.92 13.72,13.08 16.51,13.08 16.76,12.83 17.78,12.83 19.18,14.22 19.18,17.27 v19.43,17.53 | v46.99,17.65 v46.99,14.61
A15_LOW
  Top 0.305: JP2.16 31.11,25.27 32.03,24.36 37.12,24.36 37.67,23.81 39.83,23.81 42.94,20.7 48.58,20.7 49.16,20.12 U3.9
CLK  (via drill 0.35)
  Top 0.203: v25.02,14.22 25.02,13.59 25.25,13.36 25.93,13.36 26.39,12.9 28.25,12.9 28.7,12.45 29.84,12.45 32.79,15.39 40.87,15.39 v41.4,14.86 | U5.20 39.83,13.64 v39.88,13.59
  Bottom 0.203: U$1.B8 19.68,8 25.02,13.34 v25.02,14.22 | v41.4,14.86 40.13,13.59 v39.88,13.59
CLK_LOW
  Top 0.203: U5.1 39.12,19.68 41.4,19.68 41.91,20.19 41.91,21.15 39.66,23.41 37.5,23.41 36.95,23.95 31.55,23.95 29.84,25.65 29.84,30.48 30.35,30.99 39.24,30.99 JP4.1
D0
  Top 0.305: U$1.A6 14.61,7.67 U1.20
D0_LOW
  Top 0.305: JP1.1 20.95,26.66 20.8,26.66 18.98,24.84 18.26,24.84 17.27,23.85 15.57,23.85 11.1,19.38 U1.1
D1
  Top 0.305: U$1.A7 17.14,8.26 16.13,9.27 13.66,9.27 9.27,13.66 9.27,14.48 8.89,14.86 7.75,14.86 7.34,14.45 U1.18
D1_LOW
  Top 0.305: JP1.2 18.41,25.69 17.03,24.31 12.77,24.31 12.32,23.85 10.3,23.85 9.84,23.39 8.03,23.39 7.34,22.71 U1.3
D2
  Top 0.305: U$1.A8 19.68,7.62 18.03,9.27 16.78,9.27 16.32,9.73 13.85,9.73 9.73,13.85 9.73,14.67 9.08,15.32 7.44,15.32 6.69,14.56 U1.17
D2_LOW
  Top 0.305: U1.4 6.69,22.78 7.76,23.85 9.65,23.85 10.11,24.31 12.13,24.31 12.59,24.77 14.35,24.77 15.88,26.29 JP1.3
D3  (via drill 0.35)
  Top 0.305: U$1.A11 26.92,5.46 26.92,8.76 26.49,9.2 24.85,9.2 24.4,9.65 21.49,9.65 21.03,10.11 19.14,10.11 18.6,10.64 17.75,10.64 v17.53,10.87 | v14.22,10.54 13.68,10.54 10.19,14.03 10.19,14.86 9.27,15.77 7.25,15.77 6.23,14.75 6.23,14.74 6.04,14.55 U1.16
  Bottom 0.305: v17.53,10.87 17.2,10.54 v14.22,10.54
D3_LOW
  Top 0.305: U1.5 6.04,22.78 7.57,24.31 9.46,24.31 9.92,24.77 11.94,24.77 13.34,26.16 JP1.4
D4  (via drill 0.35)
  Top 0.305: U1.15 5.39,14.56 7.06,16.23 9.46,16.23 10.64,15.05 10.64,14.22 13.59,11.28 14.96,11.28 v14.99,11.3 | U$1.A12 29.97,5.21 29.97,8.51 29.29,9.2 27.25,9.2 26.8,9.65 25.04,9.65 24.59,10.11 21.68,10.11 21.22,10.57 19.32,10.57 18.79,11.1 18.36,11.1 17.78,11.68 17.02,11.68 v16.89,11.81
  Bottom 0.305: v14.99,11.3 15.37,11.68 16.76,11.68 v16.89,11.81
D4_LOW
  Top 0.305: U1.6 5.39,22.78 7.38,24.77 9.27,24.77 10.79,26.29 JP1.5
D5  (via drill 0.35)
  Top 0.305: U$1.A10 24.77,8.64 24.21,9.2 21.3,9.2 20.84,9.65 18.95,9.65 18.41,10.19 17.15,10.19 16.13,11.21 16.13,11.81 15.88,12.06 v15.88,12.44 | U1.14 4.74,14.63 6.79,16.69 9.65,16.69 11.1,15.24 11.1,14.41 13.45,12.06 v14.22,12.06
  Bottom 0.305: v15.88,12.44 14.6,12.44 v14.22,12.06
D5_LOW
  Top 0.305: U1.7 4.74,22.77 8.26,26.29 JP1.6
D6
  Top 0.305: U$1.A9 22.23,7.62 20.65,9.2 18.76,9.2 18.22,9.73 16.96,9.73 15.67,11.02 15.67,11.59 14.43,12.83 13.33,12.83 11.56,14.6 11.56,15.43 9.84,17.14 6.6,17.14 4.09,14.63 U1.13
D6_LOW
  Top 0.305: U1.8 4.09,22.89 5.71,24.51 JP1.7
D7
  Top 0.305: U$1.A3 6.99,8.51 3.69,11.8 3.69,12.5 3.44,12.75 U1.12
D7_LOW
  Top 0.305: U1.9 3.44,20.27 3.57,20.4 3.57,22.85 3.17,23.24 JP1.8
GND  (via drill 0.35)
  Top 0.203: U4.11 17.98,13.59 v17.14,13.59
  Top 0.305: U1.11 2.79,12.32 v2.92,12.19 | U5.11 32.82,13.64 v32.38,13.21 | U3.11 47.7,13.64 v47.62,13.72 | U2.11 v63.75,14.98 v63.75,14.99 | C2.2 v4.95,11.94 | C3.2 v26.16,21.08 | C1.2 v10.92,21.08 | C4.2 26.89,16 v27.05,16 | C5.2 40.65,21.08 v41.28,20.45 | C6.2 40.35,12.41 v40.77,12.83 | C7.2 v56.64,21.08 | C8.2 v57.53,14.73 | C9.2 v70.87,19.94 | C10.2 v66.93,10.92
  Top 0.508: 3V3_REG4.2 14.33,15.19 14.33,14.69 14.82,14.2 C34.2
  Top 0.61: C35.2 v16.13,19.05 | C34.2 v15.88,13.84
  Bottom 0.305: 14.73,4.95 U$1.B6
  Bottom 1.016: U$1.B7 17.14,6.35 v15.88,6.35 14.73,6.35 14.73,4.95 v15.88,4.95 17.02,4.95 U$1.B7 | U$1.B7 17.14,3.68 17.02,3.56 v15.88,3.56 14.48,3.56 14.48,4.95 U$1.B6 | v33.91,11.94 34.92,10.92 U$1.B14
  pour Route2: -2.54,55.88 74.93,55.88 74.93,-2.54 -2.54,-2.54
U
  Bottom 0.203: U$1.B18 45.09,11.18 43.94,12.32 43.94,17.91 50.42,24.38 51.86,24.38 52.7,25.23 52.7,30.35 59.05,36.7 JP5.4
V
  Bottom 0.203: U$1.B17 42.55,11.43 43.46,12.34 43.46,18.05 50.16,24.76 50.16,30.35 56.52,36.7 JP5.3
VIDEO
  Bottom 0.203: U$1.B15 37.47,8.13 42.49,13.16 42.49,18.36 45.09,20.95 45.09,30.48 JP5.1
Y
  Bottom 0.203: U$1.B16 40.01,9.77 42.98,12.75 42.98,18.2 47.62,22.85 47.62,30.48 JP5.2

## Text on the board
tPlace: +5V | -5V | +9V | +12V | -12V | GND | GND | GND | WAIT | RESET | INT | NMI | HALT | MREQ | IORQ | WAIT | RD | WR | IORQGE | RESET | ROMCS | BUSACK | BUSRQ | M1 | RFSH | CLK | VIDEO | Y | V | U | GND | GND | GND | GND | 7 | 6 | 5 | 4 | 3 | 2 | 1 | 0 | 15 | 14 | 13 | 12 | 11 | 10 | 9 | 8 | 7 | 6 | 5 | 4 | 3 | 2 | 1 | 0 | DATA | ADDRESS
bPlace: ZX Spectrum breakout 1.0 / Smashcat 13/09/24